# EAGLE board helmetpcb (EAGLE 6.1)
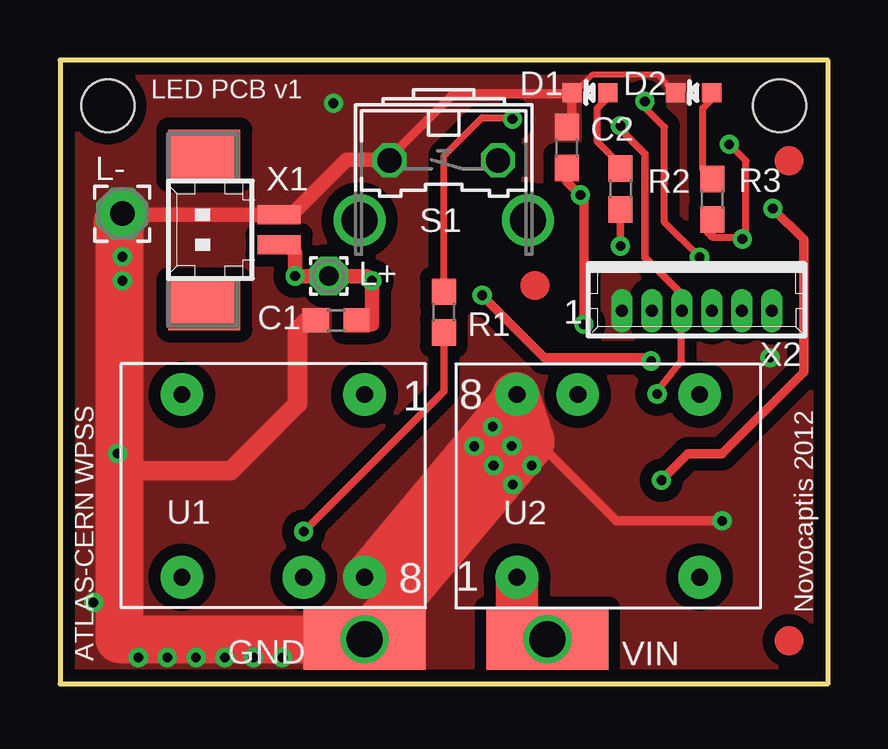
[diagram p0: board, top side]
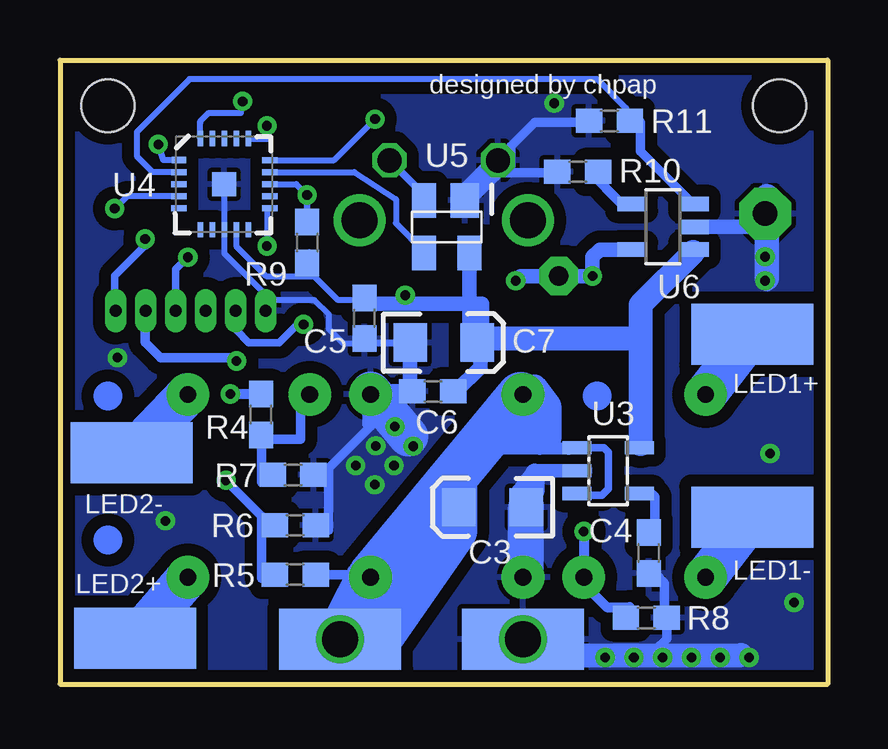
[diagram p1: board, bottom side, seen from below]

Size 32 x 26 mm. Coordinates in mm from the lower left corner, seen from the top.
Outline: 32,26 0,26 0,0 32,0 32,26
Copper layers (1*16): Top 0.035mm / dielectric 1.55mm / Bottom 0.035mm
Design rules: minimum track width 0.15mm, minimum drill 0.25mm, track to track 0.2mm, track to pad 0.2mm, pad to pad 0.2mm, via to via 0.2mm, smd to smd 0.2mm, copper to edge 0.45mm, drill to drill 0.3mm, minimum pad ring 0.2mm, minimum via ring 0.2mm, stop-mask expansion 0.1mm, vias tented up to drill 0mil, thermal gap 0.2mm
Net classes: 1 vcc: width 0.203 mm; 2 raw: width 0.203 mm
Holes 2.2 mm at 2,24.1 30,24.1
tKeepout: area 0,22.1 to 4,26.1; area 28,22.1 to 32,26.1

## Footprints (pad centres in the part's own frame; a part is rotated, then mirrored left to right if it is on the bottom)
SMD2,54-5,08 = smd 2.54 x 5.08: 1 0,0
C0603 = smd 1.1 x 1: 1 -0.85,0; 2 0.85,0
0603 = smd 1.1 x 1: 1 -0.85,0; 2 0.85,0
EIA3216 = smd 1.4 x 1.6: A 1.4,0; C -1.4,0
LED-0603 = smd 0.8 x 0.8: A 0,-0.75; C 0,0.75
1,6/0,8 = drill 0.813 pad 1.6 octagon: 1 0,0
2,15/1,0 = drill 1.016 pad 2.159 octagon: 1 0,0
B3F-31XX = drill 1.016 octagon: 1 -2.261,-1.245; 2 2.261,-1.245 | drill 1.499 pad 2.159: 3 -3.505,1.245; 4 3.505,1.245
LDU0516S350 = drill 0.7 pad 1.778: 1 -7.62,-2.54; 4 0,-2.54; 5 0,5.08; 7 -5.08,5.08; 8 -7.62,5.08
SOT23-5 = smd 0.55 x 1.2: 1 -0.95,-1.3; 2 0,-1.3; 3 0.95,-1.3; 4 0.95,1.3; 5 -0.95,1.3
QFN20 = smd 1 x 1: 0 0,0 | smd 0.635 x 0.241: 1 -1.9,1; 2 -1.9,0.5; 3 -1.9,0; 4 -1.9,-0.5; 5 -1.9,-1; 11 1.9,-1; 12 1.9,-0.5; 13 1.9,0; 14 1.9,0.5; 15 1.9,1 | smd 0.241 x 0.635: 6 -1,-1.9; 7 -0.5,-1.9; 8 0,-1.9; 9 0.5,-1.9; 10 1,-1.9; 16 1,1.9; 17 0.5,1.9; 18 0,1.9; 19 -0.5,1.9; 20 -1,1.9
SOT143 = smd 1.2 x 1.44: 1 -0.75,-1.1 | smd 1 x 1.44: 2 0.95,-1.1; 3 0.95,1.1; 4 -0.95,1.1
SOT23-5' = smd 0.6 x 1.2: 1 -0.95,-1.306; 2 0,-1.306; 3 0.95,-1.306; 4 0.95,1.306; 5 -0.95,1.306
53398-02 = smd 0.8 x 1.8: 1 0.625,-2.5; 2 -0.625,-2.5 | smd 2.1 x 3: S1 3.125,0.625; S2 -3.125,0.625
53047-06 = drill 0.5 pad 0.698 long: 1 3.125,0.45; 2 1.875,0.45; 3 0.625,0.45; 4 -0.625,0.45; 5 -1.875,0.45; 6 -3.125,0.45

## Placement (x,y rotation side)
_GND  WIREPADSMD2,54-5,08  [SMD2,54-5,08]  12.7,1.87 270 bottom
C1  1uF  [C0603]  11.52,15.16 180 top
C2  0.1uF  [0603]  21.14,22.35 90 top
C3  10uF  [EIA3216]  13.97,7.37 180 bottom
C4  0.1uF  [0603]  7.46,5.46 270 bottom
C5  0.1uF  [0603]  19.3,15.24 90 bottom
C6  0.1uF  [0603]  16.46,12.19 180 bottom
C7  10uF  [EIA3216]  16,14.22 0 bottom
D1  Red  [LED-0603]  22.1,24.64 90 top
D2  Green  [LED-0603]  26.42,24.64 90 top
GND  WIREPADSMD2,54-5,08  [SMD2,54-5,08]  12.7,1.87 90 top
L+  WIREPAD1,6/0,8  [1,6/0,8]  11.2,17 0 top
L-  WIREPAD2,15/1,0  [2,15/1,0]  2.6,19.6 0 top
LED1+  [SMD2,54-5,08]  3.14,14.57 90 bottom
LED1-  [SMD2,54-5,08]  3.14,6.95 90 bottom
LED2+  [SMD2,54-5,08]  28.86,1.9 90 bottom
LED2-  [SMD2,54-5,08]  29.01,9.63 90 bottom
R1  30K  [0603]  16,15.49 90 top
R2  330  [0603]  23.37,20.63 270 top
R3  330  [0603]  27.2,20.2 90 top
R4  30K  [0603]  23.62,11.23 90 bottom
R5  330K  [0603]  22.19,4.55 0 bottom
R6  220k  [0603]  22.19,6.62 180 bottom
R7  10K  [0603]  22.28,8.71 0 bottom
R8  10K  [0603]  7.56,2.76 180 bottom
R9  10K  [0603]  21.7,18.4 270 bottom
R10  10k  [0603]  10.41,21.34 0 bottom
R11  10k  [0603]  9.09,23.46 0 bottom
S1  BTN  [B3F-31XX]  16,20.57 180 top
U1  LDU0516S350  [LDU0516S350]  5.08,9.53 180 top
U2  LDU0516S350  [LDU0516S350]  26.67,6.99 0 top
U3  LP2992  [SOT23-5]  9.14,8.89 270 bottom
U4  ATTINY84A  [QFN20]  25.15,20.83 0 bottom
U5  MAX6816  [SOT143]  15.88,19.05 180 bottom
U6  FPF2106  [SOT23-5']  6.86,19.05 90 bottom
VIN  WIREPADSMD2,54-5,08  [SMD2,54-5,08]  20.32,1.87 270 top
VIN1  WIREPADSMD2,54-5,08  [SMD2,54-5,08]  20.32,1.87 270 bottom
X1  53398-02  [53398-02]  6.64,18.92 90 top
X2  53047-06  [53047-06]  26.54,16 180 top

## Library data of the parts
_GND GND L+ L- LED1+ LED1- LED2+ LED2- VIN VIN1 = wirepad
C1 = rcl
C2-C7 D1 D2 R1-R11 U3 = SparkFun
S1 = switch-omron; MPN: B3F-3100; OC_FARNELL: 959704; OC_NEWARK: 36M3582
U1 U2 U4-U6 = gumstix
X1 = con-molex; OC_FARNELL: unknown; OC_NEWARK: unknown
X2 = con-molex; MPN: 53047-0610-C; OC_FARNELL: 9733078; OC_NEWARK: 03M2965

## Nets
+5V: C5.2 C6.1 C7.A R9.2 U3.5 U4.9 U5.4 U6.1 X2.5
BAT: R5.1 R6.2 U4.4
BUTTON: U4.14 U5.3
GND [raw]: _GND.1 C1.2 C2.2 C3.C C4.2 C5.1 C6.2 C7.C D1.C D2.C GND.1 L-.1 R6.1 R7.2 R8.1 R10.1 R11.1 S1.2 U1.8 U2.8 U3.2 U4.0 U4.8 U5.1 U6.2 X1.1 X2.1
LED: R2.2 U4.11
LED+: LED2+.1 U2.4
LED-: LED2-.1 U2.5
LIGHTPWM: R1.2 U4.15
LUXLED1+: LED1+.1 U1.4
LUXLED1-: LED1-.1 U1.5
MISO: U4.20 X2.4
MOSI: R4.2 U4.16 X2.3
N4: R11.2 U4.2 U6.3
N$1: R1.1 R8.2 U1.7
N$2: D1.A R2.1
N$3: R10.2 U6.4
N$4: C1.1 L+.1 U6.5 X1.2
N$5: S1.1 U5.2
N$7: D2.A R3.2
N$8: R4.1 R7.1 U2.7
N$9: C4.1 U3.4
RAW [raw]: C3.A R5.2 U1.1 U2.1 U3.1 U3.3 VIN1.1 VIN.1
RESET: C2.1 R9.1 U4.13 X2.2
SCK: R3.1 U4.1 X2.6

## Tracks (layer width: path | path; a pad name or v marks a point on that pad's centre or on a via)
+5V  (via drill 0.4)
  Top 0.25: 24.78,13.6 24.78,13.58 24.6,13.4 24.6,13.42 v24.64,13.46
  Top 0.4: 24.78,13.6 20.2,13.6 v17.6,16.2
  Bottom 0.25: U4.9 24.65,18.25 23.4,17 21.4,17 | 19.26,15.85 19.26,15.66 | 21.32,17.46 R9.2 | 7.8,10 7.8,9.88 U3.5 | 7.8,15.8 7.8,14.44 7.84,14.4 | 21.8,17.4 21.4,17.4 | 21.4,17.4 21.38,17.4 21.32,17.46 | 21.4,17.4 21.4,17.8 | v17.6,16.2 17.6,16 17.8,15.8 19.2,15.8 19.3,15.9 | 19.3,15.9 19.4,16 19.2,16.2 | 19.3,15.9 C5.2 19.41,16 20.4,16 21.4,17 | 21.4,17 21.8,17.4 | 21.32,17.46 21.32,17.72 21.4,17.8 | 21.4,17 21.4,17.4 | 21.4,17.8 21.6,18 21.8,17.8 21.8,17.4 | 28.45,15.52 28.45,15.55 | 28.45,15.55 28.4,15.6 | X2.5 28.45,15.55
  Bottom 0.4: 28.45,15.52 28.45,14.25 27.8,13.6 24.78,13.6 v24.64,13.46
  Bottom 0.406: 5.6,18 5.6,18.05 U6.1
  Bottom 0.61: C6.1 15.49,12.19 14.48,13.21 14.48,14.1 C7.A 14.6,14.2 | C5.2 19.26,15.85 14.4,15.85 14.4,14.4 14.53,14.53 14.93,14.53 | U5.4 14.93,14.53 | 14.93,14.53 14.6,14.2 | 14.6,14.2
  Bottom 1: 14.4,14.4 7.84,14.4 | 5.6,18 7.8,15.8 7.8,10
BAT  (via drill 0.4)
  Top 0.4: v25.08,8.49 26.19,9.6 27.6,9.6 31,13 31,18.53 v29.72,19.81
  Bottom 0.25: U4.4 29.2,20.33 v29.72,19.81
  Bottom 0.4: 23.6,7 25.08,8.48 v25.08,8.49 | R5.1 23.19,4.4 23.6,4.4 23.6,7 | 23.6,7 23.22,6.62 R6.2
BUTTON
  Bottom 0.25: U5.3 16.8,18 18,19.2 18,20.2 19.73,21.33 U4.14
GND  (via drill 0.4, 1.5 pad 2)
  Top 0.25: D2.C 24.9,25.4 22.2,25.4 21.4,24.6 21.35,24.6 D1.C | X1.1 10.05,19.95 | S1.2 13.2,21.84 | 18,10.8 19.2,12
  Top 0.305: 25.91,24.65 D2.C
  Top 0.4: 13.72,21.84 13.72,21.92 16.4,24.6 21.4,24.6 | D1.C 21.35,23.01 C2.2 | v27.6,6.8 23.2,6.8 19.2,10.8 | 19.2,10.8 19.2,12 | 19.2,10.8 18,10.8
  Top 0.61: X1.1 3.04,19.55 2.54,19.05 | 9.65,19.56 10.05,19.95 11.94,21.84 13.2,21.84 13.72,21.84
  Top 0.813: 2.55,19.06 2.54,19.05 | 2.54,8.89 7.11,8.89 9.91,11.68 9.91,14.73 10.41,15.24 C1.2
  Top 1: 2.54,17.78 2.54,19.05 2.54,19.54 L-.1
  Top 1.778: U2.8 U1.8
  Top 2: 13.2,2.4 19.6,10 | 19.6,10.2 19,12 | _GND.1 2.48,1.87 2.48,19.12 2.4,19.2
  Bottom 0.25: 23.4,16 23.4,16.2 25.15,17.95 U4.0 25.15,19.05 | 23.4,16 23.4,15.57 X2.1 | 23.4,16 21.4,16 20.8,15.4 20.8,14.8 20.2,14.2 17.4,14.2 C7.C 18.94,14.22 C5.1 19.3,14.5 19.2,14.4 | 18,10.72 18,9.91 17.47,10.31 17.53,9.91 17.53,10.16 | v18.03,10.72 18,10.72 | 18,10.72 18,10.8 | 19.05,12.19 U2.8 | 13.97,21.59 13.81,21.59 | 7.2,4.8 7.27,4.8 C4.2 | 12.2,8.8 12,8.89 | C3.C 12.6,7.4
  Bottom 0.254: U4.0 U4.8
  Bottom 0.305: U5.1 15.12,20.2 15.24,20.32 | 19.42,14.48 C5.1
  Bottom 0.4: 19.6,12.06 U2.8 19.05,10.75 | 21,8.8 21,8.4 21.12,8.4 | R7.2 21.12,8.4 | 21,8.8 20.8,9 | 20.8,9 19.05,10.75 | 7.8,1.4 7.2,1.4 6.71,1.89 R8.1 6.8,2.86 6.8,4.2 7.21,4.61 C4.2 | 21.12,6.4 20.8,6.4 20.8,9 | 21,8.8 21.4,8.4 | 21.4,8.4 21.6,8.4 | 21.12,8.4 21.4,8.4 | R11.1 10,23.4 12.2,23.4 13.2,22.4 13.2,21.6 | R10.1 11.29,21.3 13.97,21.3 | 19.05,10.75 19.15,10.75 19.2,10.8 19.2,12
  Bottom 0.406: 7.8,1.4 13,1.4
  Bottom 0.559: U3.2 12,8.89 12.19,8.89 | 12.45,7.49 C3.C
  Bottom 0.61: U2.8 18.92,12.19 C6.2 17.4,12.69 C7.C | U6.2 2.54,19.05 2.54,19.06 | 2.54,16.91 2.54,16.66 v2.6,16.8 | v2.6,17.8 2.6,17.94 2.54,18 | 2.54,19.06 2.4,19.2 | 2.54,19.06 2.54,19.54 L-.1
  Bottom 0.8: 12.8,8 12.2,8.8 12.2,8 12.6,7.4
  Bottom 0.813: 13.97,21.59 13.97,21.3 U5.1 | S1.2 13.97,21.59 | 13.97,21.59 15.24,20.32
  Bottom 1: U1.8 12.57,4.45 | 13,1.87 13,1.4 | 12.6,1.8 11,1.2 3.6,1.2
  Bottom 1.016: 2.54,20.32 2.54,19.05 2.54,18 2.54,16.91 | 12.45,7.24 C3.C
  Bottom 1.5: 12.57,4.45 C3.C
  Bottom 1.676: 19.05,12.19 17.47,10.31
  other vias: 2.4,9.6 11.4,24.2 1.4,3.4 29.6,13.6 18.83,9.92 18.07,9.11 18.87,8.31 19.67,9.11 9.27,1.11 8.07,1.11 6.87,1.11 5.67,1.11 4.47,1.11 3.27,1.11 17.27,9.91 12.7,1.87
  pour Bottom (isolate 0.5): 0,0 32,0 32,26 0,26
  pour Top (isolate 0.5, no thermals): 0,0 32,0 32,26 0,26
LED  (via drill 0.4)
  Top 0.305: R2.2 v23.37,18.25
  Bottom 0.254: U4.11 23.37,19.83 v23.37,18.25
LED+
  Bottom 1.778: U2.4 LED2+.1
LED-
  Bottom 1.778: U2.5 LED2-.1
LIGHTPWM  (via drill 0.4)
  Top 0.3: 16,16.76 16,22 17.6,23.6 18.8,23.6 v18.86,23.54 v18.87,23.54
  Top 0.305: 16,16.76 R1.2
  Bottom 0.25: U4.15 20.57,21.83 v18.86,23.54 | v18.87,23.54 v18.86,23.54 | v18.86,23.54 18.8,23.6
LUXLED1+
  Bottom 1.778: U1.4 LED1+.1
LUXLED1-
  Bottom 1.778: U1.5 LED1-.1
MISO  (via drill 0.4)
  Top 0.3: v26.67,17.78 25.2,19.25 25.2,23.2 24.38,24.02 v24.38,24.28
  Bottom 0.25: 26.15,23.38 26.15,23.45 25.8,23.8 24.46,23.8 v24.38,24.28
  Bottom 0.254: U4.20 26.15,23.38
  Bottom 0.305: v26.67,17.78 27.18,17.27 27.18,15.56 X2.4
MOSI  (via drill 0.4)
  Top 0.254: 25.91,15.49 25.92,15.49 X2.3 | 25.09,12.45 v24.89,12.08
  Top 0.3: 25.09,12.45 25.91,13.46 25.91,15.49 | 24.89,11.94 v24.89,12.08
  Top 0.305: v23.37,23.26 23.62,22.86 24.38,22.1 24.38,17.78 25.91,16.26 25.91,15.49
  Bottom 0.25: 23.31,22.73 23.31,23.11 23.4,23.2 23.4,23.23 v23.37,23.26
  Bottom 0.254: U4.16 23.31,22.73
  Bottom 0.406: R4.2 v24.89,12.08
N4
  Bottom 0.25: U6.3 5.6,20 | U4.2 28.13,21.33 28.8,22 28.8,23 26.6,25.2 9.6,25.2 8.4,24 8.4,23.6 | 8.2,23.4 8.24,23.44 R11.2
  Bottom 0.4: 5.6,20 7.8,22.2 7.8,23.4 8.2,23.4 8.4,23.6
N$1  (via drill 0.4)
  Top 0.305: v10.16,6.35 16,12.19 R1.1
  Bottom 0.406: v10.16,6.35 U1.7 10.16,4.16 9.2,3.2 8.24,3.2 R8.2
N$2
  Top 0.3: 23.11,21.34 23.11,21.89 22.4,22.6 22.4,24 23,24.6 22.89,24.6 D1.A
  Top 0.305: 23.11,21.34 23.23,21.34 R2.1
N$3
  Bottom 0.406: U6.4 8.57,20 9.91,21.34 R10.2
N$4  (via drill 0.4)
  Top 0.25: 13,15 13,14.96 C1.1 | X1.2 8.9,18.3 8.8,18.2
  Top 0.61: C1.1 12.7,15.24 | 13,15 v13,16.8 12.8,17 L+.1 v9.8,17 9.8,18 9.6,18.2 9.24,18.2 X1.2
  Bottom 0.61: v13,16.8 12.8,17 v9.8,17 9.8,17.8 9.5,18.1 U6.5
N$5
  Bottom 0.305: 16.82,20.38 S1.1
  Bottom 0.406: U5.2 16.82,20.38
N$7
  Top 0.3: R3.2 26.8,21.45 26.8,24 27.4,24.6 27.36,24.64
  Top 0.4: 27.36,24.64 D2.A
N$8
  Bottom 0.4: U2.7 21.97,11.69 21.97,10.2 23.44,10.2 R4.1 23.6,10.4 23.6,8.4 23.44,8.4 R7.1
N$9
  Bottom 0.305: U3.4 7.84,7.99
  Bottom 0.4: C4.1 7.2,6.57 7.2,7.8 7.4,8 7.8,8 7.84,7.96 U3.4
RAW  (via drill 1.5 pad 2)
  Top 1.778: VIN1.1 19.05,1.87 U2.1
  Bottom 0.25: 12.8,12 13.01,11.69 | 11.6,10.2 12,9.8
  Bottom 0.305: U3.1 9.33,9.84 9.14,9.65 9.14,8.13 9.4,7.87 10.38,7.87 U3.3
  Bottom 0.4: R5.2 19.16,4.55 U2.1 16.13,7.37 C3.A
  Bottom 0.5: 10.65,9.84 10.8,9.8 12,9.8 14.4,9.8 13.8,10.6 | 12,10 12,10.8 12.8,10.8 | 12.8,12 U1.1
  Bottom 0.559: U3.1 10.65,9.84
  Bottom 1: VIN1.1 20.32,1.28 20.4,1.2 | 12.2,12.4 11.6,11.6 11.6,10.2
  Bottom 2: 15.6,8.4 15.6,6.4 18.8,1.8 20.4,1.8 U2.1 12.8,12 12.8,10.8 12.8,10.6 13.8,10.6
  other vias: 20.32,1.87
RESET  (via drill 0.4)
  Top 0.25: C2.1 21.14,20.94 | 21.84,20.23 v21.7,20.37
  Top 0.305: 22.1,14.99 v21.84,14.99
  Top 0.4: 21.14,20.94 v21.7,20.37 | v21.84,14.99 21.84,20.23
  Bottom 0.25: U4.13 22.15,20.83 v21.7,20.37 R9.1 21.7,20.3 21.6,20.4
  Bottom 0.305: v21.84,14.99 22.1,14.99 22.86,14.22 24.13,14.22 24.64,14.73 24.64,15.52 X2.2
SCK  (via drill 0.4)
  Top 0.3: 27.2,18.6 R3.1 | 27.2,18.6 28.39,18.6 v28.45,18.54 28.6,18.69 28.6,21.8 27.91,22.49 v27.9,22.49 | 27.2,18.6 27,18.8 27,19.4
  Top 0.4: 27.44,19.35 R3.1 27.35,19.2
  Bottom 0.254: U4.1 27.69,21.83 v27.9,22.49
  Bottom 0.305: 28.45,18.29 29.72,17.02 29.72,15.6 X2.6
  Bottom 0.4: v28.45,18.54 28.45,18.29
(copper drawn outside any net)
  shapes: Bottom circle x3, Top circle x3

## Text on the board
tPlace: LED PCB v1 | 1 | ATLAS-CERN WPSS | Novocaptis 2012
bPlace: designed by chpap